# EAGLE board Platypus_v1_0_Proto_v3_0 (EAGLE 7.2.0)
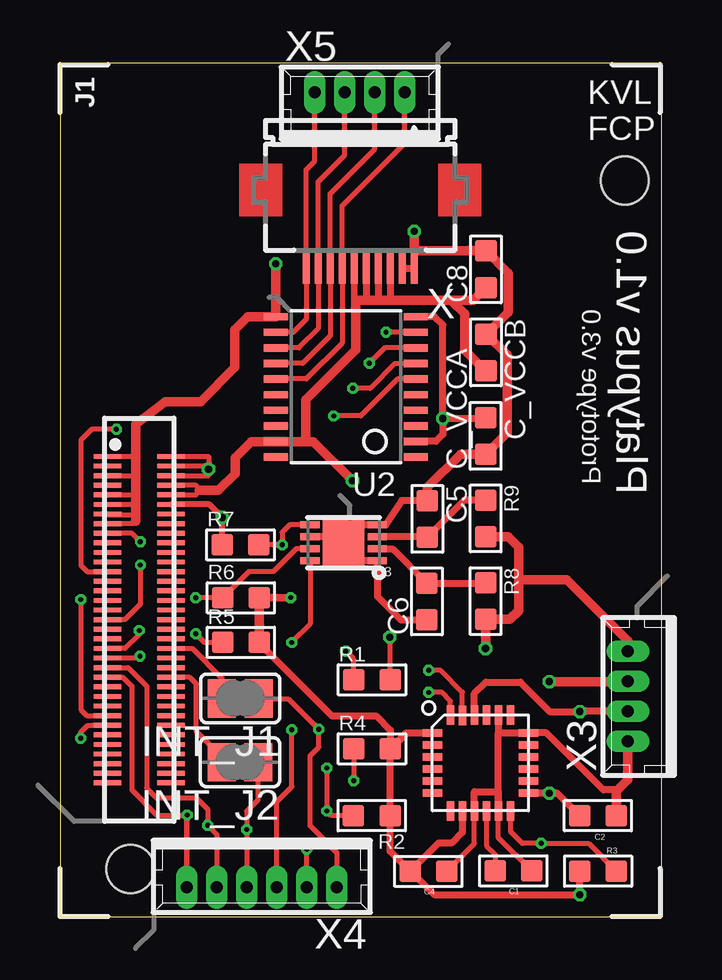
[diagram p0: board, top side]
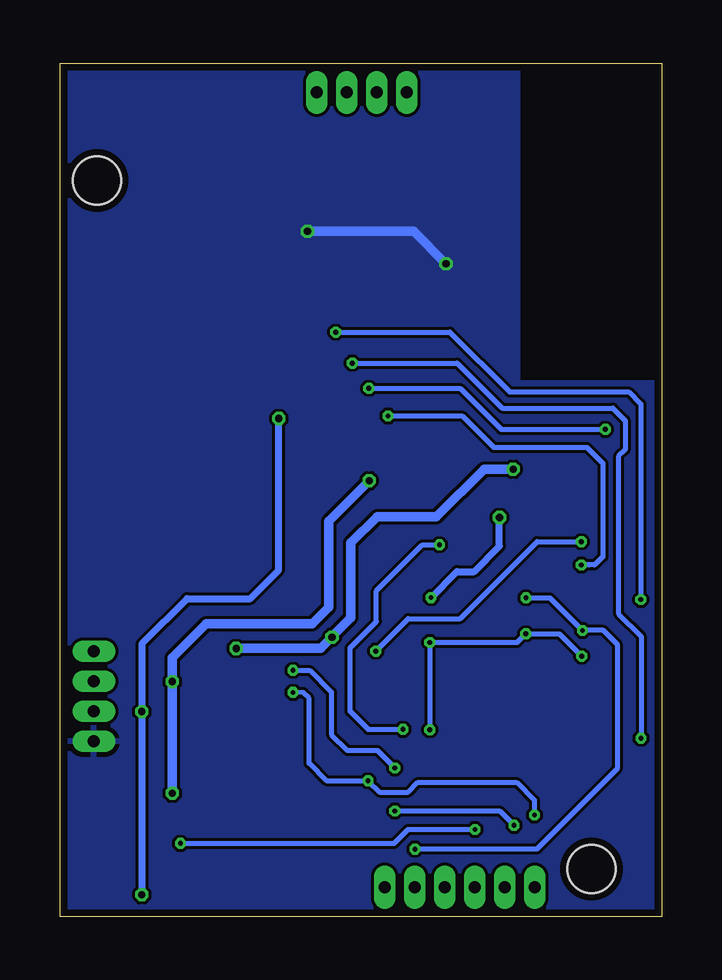
[diagram p1: board, bottom side, seen from below]

Size 25.07 x 35.55 mm. Coordinates in mm from the lower left corner, seen from the top.
Outline: 0,0 25.07,0 25.07,35.55 0,35.55 0,0
Copper layers (1*16): Top 0.035mm / dielectric 1.5mm / Bottom 0.035mm
Design rules "PCB-POOL HighSpec": minimum track width 0.125mm, minimum drill 0.2mm, track to track 0.125mm, track to pad 0.125mm, pad to pad 0.125mm, via to via 0.125mm, smd to smd 0.125mm, copper to edge 0.3mm, drill to drill 0.2mm, minimum pad ring 0.2mm, minimum via ring 0.125mm, stop-mask expansion 0.075mm, vias tented up to drill 0mil, thermal gap 0.2mm

## Footprints (pad centres in the part's own frame; a part is rotated, then mirrored left to right if it is on the bottom)
C0603 = smd 0.889 x 0.889: 1 -0.762,0; 2 0.762,0
SJ = smd 1.168 x 1.6: 1 -0.762,0; 2 0.762,0
EDISON_DAUGHTER = smd 1.14 x 0.2: 1 1.98,19.17; 2 4.62,19.17; 3 1.98,18.77; 4 4.62,18.77; 5 1.98,18.37; 6 4.62,18.37; 7 1.98,17.97; 8 4.62,17.97; 9 1.98,17.57; 10 4.62,17.57; 11 1.98,17.17; 12 4.62,17.17; 13 1.98,16.77; 14 4.62,16.77; 15 1.98,16.37; 16 4.62,16.37; 17 1.98,15.97; 18 4.62,15.97; 19 1.98,15.57; 20 4.62,15.57; 21 1.98,15.17; 22 4.62,15.17; 23 1.98,14.77; 24 4.62,14.77; 25 1.98,14.37; 26 4.62,14.37; 27 1.98,13.97; 28 4.62,13.97; 29 1.98,13.57; 30 4.62,13.57; 31 1.98,13.17; 32 4.62,13.17; 33 1.98,12.77; 34 4.62,12.77; 35 1.98,12.37; 36 4.62,12.37; 37 1.98,11.97; 38 4.62,11.97; 39 1.98,11.57; 40 4.62,11.57; 41 1.98,11.17; 42 4.62,11.17; 43 1.98,10.77; 44 4.62,10.77; 45 1.98,10.37; 46 4.62,10.37; 47 1.98,9.97; 48 4.62,9.97; 49 1.98,9.57; 50 4.62,9.57; 51 1.98,9.17; 52 4.62,9.17; 53 1.98,8.77; 54 4.62,8.77; 55 1.98,8.37; 56 4.62,8.37; 57 1.98,7.97; 58 4.62,7.97; 59 1.98,7.57; 60 4.62,7.57; 61 1.98,7.17; 62 4.62,7.17; 63 1.98,6.77; 64 4.62,6.77; 65 1.98,6.37; 66 4.62,6.37; 67 1.98,5.97; 68 4.62,5.97; 69 1.98,5.57; 70 4.62,5.57 | hole 2: 23.53,30.67; 2.93,1.98
R0603 = smd 0.889 x 0.889: 1 -0.762,0; 2 0.762,0
LGA-24 = smd 0.8 x 0.3: 1 -2,1.25; 2 -2,0.75; 3 -2,0.25; 4 -2,-0.25; 5 -2,-0.75; 6 -2,-1.25; 13 2,-1.25; 14 2,-0.75; 15 2,-0.25; 16 2,0.25; 17 2,0.75; 18 2,1.25 | smd 0.3 x 0.8: 7 -1.25,-2; 8 -0.75,-2; 9 -0.25,-2; 10 0.25,-2; 11 0.75,-2; 12 1.25,-2; 19 1.25,2; 20 0.75,2; 21 0.25,2; 22 -0.25,2; 23 -0.75,1.975; 24 -1.25,2
TSSOP20 = smd 0.305 x 0.991: 1 -2.925,-2.918; 2 -2.275,-2.918; 3 -1.625,-2.918; 4 -0.975,-2.918; 5 -0.325,-2.918; 6 0.325,-2.918; 7 0.975,-2.918; 8 1.625,-2.918; 9 2.275,-2.918; 10 2.925,-2.918; 11 2.925,2.918; 12 2.275,2.918; 13 1.625,2.918; 14 0.975,2.918; 15 0.325,2.918; 16 -0.325,2.918; 17 -0.975,2.918; 18 -1.625,2.918; 19 -2.275,2.918; 20 -2.925,2.918
TDFN-8 = smd 0.8 x 0.3: 1 -1.4,0.75; 2 -1.4,0.25; 3 -1.4,-0.25; 4 -1.4,-0.75; 5 1.4,-0.75; 6 1.4,-0.25; 7 1.4,0.25; 8 1.4,0.75 | smd 1.73 x 1.88: EP 0,0
FH12-10S-0.5SH = smd 0.3 x 1.3: 1 -2.25,3.25; 2 -1.75,3.25; 3 -1.25,3.25; 4 -0.75,3.25; 5 -0.25,3.25; 6 0.25,3.25; 7 0.75,3.25; 8 1.25,3.25; 9 1.75,3.25; 10 2.25,3.25
53047-04 = drill 0.5 pad 0.698 long: 1 1.875,0.45; 2 0.625,0.45; 3 -0.625,0.45; 4 -1.875,0.45
53047-06 = drill 0.5 pad 0.698 long: 1 3.125,0.45; 2 1.875,0.45; 3 0.625,0.45; 4 -0.625,0.45; 5 -1.875,0.45; 6 -3.125,0.45

## Placement (x,y rotation side)
C1  0.1µF  [C0603]  18.89,1.9 180 top
C2  100nF  [C0603]  22.41,4.21 180 top
C4  10nF  [C0603]  15.35,1.88 180 top
C5  10nF  [C0603]  15.31,16.57 270 top
C6  1µF  [C0603]  15.29,13.13 90 top
C8  1µF  [C0603]  17.75,26.97 90 top
C_VCCA  0.1µF  [C0603]  17.73,20.03 90 top
C_VCCB  0.1µF  [C0603]  17.75,23.51 270 top
INT_J1  [SJ]  7.51,9.09 180 top
INT_J2  [SJ]  7.5,6.43 180 top
J1  EDISON_CONNECTOR_FULLMOUNTING_HOLES  [EDISON_DAUGHTER]  0,0 0 top
R1  10k  [R0603]  13,9.86 0 top
R2  10k  [R0603]  12.99,4.21 180 top
R3  10k  [R0603]  22.42,1.89 180 top
R4  10k  [R0603]  13,6.99 0 top
R5  4.7k  [R0603]  7.54,11.42 0 top
R6  4.7k  [R0603]  7.54,13.28 0 top
R7  4.7k  [R0603]  7.52,15.49 0 top
R8  1k  [R0603]  17.73,13.14 270 top
R9  150  [R0603]  17.73,16.59 270 top
U1  MPU-9250  [LGA-24]  17.52,6.4 0 top
U2  TXB0108  [TSSOP20]  11.91,22.07 90 top
U3  MAX17043  [TDFN-8]  11.82,15.57 180 top
X  SHARP96  [FH12-10S-0.5SH]  12.51,30.27 180 top
X3  Power TP  [53047-04]  24.11,9.17 90 top
X4  I2C TP  [53047-06]  8.41,1.67 180 top
X5  Display TP  [53047-04]  12.49,33.89 0 top

## Library data of the parts
C1 C2 C4-C6 C8 C_VCCA C_VCCB R1-R9 = Discrete
INT_J1 INT_J2 = jumper
J1 = Edison
U1 = template
U2 = adafruit
U3 = SparkFun-PowerIC; PROD-ID: IC-10399
X = con-hirose; MPN: FH12-10S-0.5SH(55); OC_FARNELL: 1324540; OC_NEWARK: 34M6152
X3 X5 = con-molex; MF: WALDOM/MOLEX; MPN: 53047-0410; OC_FARNELL: 9733060; OC_NEWARK: 38C9900
X4 = con-molex; MPN: 53047-0610-C; OC_FARNELL: 9733078; OC_NEWARK: 03M2965

## Nets
1.8V: C4.2 C_VCCA.2 J1.12 R2.1 R3.2 R4.2 R5.2 R6.2 R7.1 U1.1 U1.8 U1.22 U2.2 U2.10 X3.3
3.3V: C2.2 C8.1 C_VCCB.2 J1.8 J1.10 U1.13 U2.19 X3.2 X.3 X.4 X.5 X.6
BAT_ALERT: INT_J1.1 R7.2 U3.5 X4.6
DCIN: J1.14
FAULT: J1.19
FW_RCVR: J1.69
GND: C1.1 C2.1 C4.1 C5.1 C6.1 C8.2 C_VCCA.1 C_VCCB.1 J1.1 J1.5 J1.9 J1.11 J1.13 J1.15 U1.9 U1.11 U1.18 U1.20 U2.11 U3.1 U3.4 U3.6 U3.EP X3.4 X.1 X.2
GP12_PWM0: J1.35 U2.6
GP13_PWM1: J1.33
GP14: INT_J2.2 J1.48
GP15: INT_J1.2 J1.42
GP19_I2C_1_SCL: J1.41 R6.1 U3.7 X4.5
GP20_I2C_1_SDA: J1.43 R5.1 U3.8 X4.4
GP27_I2C_6_SCL: J1.45 R2.2 U1.23 X4.2
GP28_I2C_6_SDA: J1.47 R4.1 U1.24 X4.1
GP40_I2S_2_CLK: J1.52
GP41_I2S_2_FS: J1.54
GP42_I2S_2_RXD: J1.50
GP43_I2S_2_TXD: J1.56
GP44: J1.24
GP45: J1.26
GP46: J1.28
GP47: J1.30
GP48: J1.32
GP49: J1.34
GP77_SD_0_CD#: J1.60
GP78_SD_0_CLK: J1.58
GP79_SD_0_CMD: J1.62
GP80_SD_0_DAT0: J1.66
GP81_SD_0_DAT1: J1.70
GP82_SD_0_DAT2: J1.64
GP83_SD_0_DAT3: J1.68
GP84_SD_CLK_FB: J1.44
GP109_SPI_2_CLK: J1.55 U2.9
GP110_SPI_2_FS0: J1.53
GP111_SPI_2_FS1: J1.51
GP114_SPI_2_RXD: J1.59
GP115_SPI_2_TXD: J1.57 U2.8
GP128_UART_1_CTS: J1.65
GP129_UART_1_RTS: J1.63
GP130_UART_1_RX: J1.61
GP131_UART_1_TX: J1.46
GP134_UART_2_RX: J1.22
GP135_UART_2_TX: J1.27
GP165: J1.25 U2.7
GP182_PWM2: J1.37
GP183_PWM3: J1.39
IMU_INT: INT_J2.1 R3.1 U1.12 X4.3
MSIC_SLP_CLK: J1.7
N$5: C1.2 U1.10
N$6: C6.2 R8.1 U3.2
N$13: C5.2 R9.1 U3.3
OSC_CLK_OUT: J1.67
PSW: J1.21
PWRBTN#: J1.17 R1.1
RCVR_MODE: J1.31
RESET_OUT#: J1.36
SHARP_EXT: U2.15 X5.1 X.7
SHARP_SCLK: U2.12 X5.4 X.10
SHARP_SCS: U2.14 X5.2 X.8
SHARP_SI: U2.13 X5.3 X.9
USB_DN: J1.18
USB_DP: J1.16
USB_ID: J1.3
USB_VBUS: J1.20
V_BAT_BKUP: J1.23
VSYS: J1.2 J1.4 J1.6 R1.2 R8.2 R9.2 X3.1

## Tracks (layer width: path | path; a pad name or v marks a point on that pad's centre or on a via)
1.8V  (via drill 0.2, 0.3)
  Top 0.2: C_VCCA.2 17.69,20.75 | U1.1 14.51,7.65 13.77,6.91 13.77,2.73 14.6,1.9
  Top 0.24: 6.22,17.17 J1.12
  Top 0.25: R7.1 v6.76,16.63 | v6.76,16.63 6.22,17.17
  Top 0.3: v15.95,20.75 v15.95,20.74 v15.96,20.75 17.69,20.75 | v15.95,20.75 15.95,24.65 15.6,25 U2.10 | v15.95,20.75 15.95,20.09 15.66,19.8 U2.2 | R3.2 v21.66,0.91 15.59,0.91 14.6,1.9 | v6.76,16.63 | R6.2 8.31,13.29 v9.61,13.29 R6.2 8.29,11.39 8.3,11.39 11.33,8.36 13.17,8.36 13.76,7.77 R4.2 | R4.2 13.76,4.22 R2.1 13.75,2.72 C4.2 15.77,3.06 16.32,3.06 16.77,3.51 U1.8 | R4.2 14.42,7.65 U1.1 | X3.3 v21.67,8.55 v21.66,8.54 20.41,8.54 19.18,9.77 17.74,9.77 17.27,9.3 U1.22 | R4.2
  Top 0.4: R6.2 R5.2 | R7.1
  Bottom 0.3: v21.66,0.91 21.66,4.89 v21.66,8.54 21.66,11.36 19.77,13.25 17.14,13.25 15.96,14.43 v15.95,20.75 | v9.61,13.29 8.53,14.37 7.82,14.37 6.76,15.43 v6.76,16.63
3.3V  (via drill 0.3)
  Top 0.2: U1.13 | J1.8 5.68,17.97 5.8,17.76 5.66,17.57 J1.10 | C_VCCB.2 17.71,22.75
  Top 0.28: X.6 12.26,25.68 12.32,25.68
  Top 0.3: 13.76,27.05 X.3 13.76,25.68 13.74,25.68 | U2.19 | X3.2 | X.6 | X.5 12.76,25.68 | X.4 13.26,25.68 13.27,25.68 | U1.13 v20.38,5.15 v20.39,5.14 20.72,5.14 C2.2
  Top 0.4: 10.23,19.79 U2.19 7.97,19.79 7.3,19.12 7.3,18.46 6.6,17.76 5.8,17.76 | 10.23,19.79 10.23,21.53 12.32,23.62 12.32,25.68 12.76,25.68 13.27,25.68 13.74,25.68 | 13.76,25.68 16.29,25.68 | 16.29,25.68 17.22,25.68 C8.1 | 17.71,22.75 16.86,23.6 16.86,25.11 16.29,25.68 | X3.2 v20.39,9.79 | 10.23,19.79 10.56,19.79 v12.19,18.16
  Bottom 0.4: v20.39,5.14 v20.39,9.79 20.39,10.78 18.97,12.2 14.55,12.2 13.87,12.88 13.87,16.48 v12.19,18.16
BAT_ALERT  (via drill 0.2)
  Top 0.2: X4.6 11.53,2.67 10.42,3.78 10.42,6.69 10.79,7.06 v10.78,7.8 9.51,9.07 8.29,9.07 | R7.2 v9.26,15.49 9.26,16.01 9.57,16.32 U3.5
  Top 0.3: INT_J1.1 8.29,9.07
  Bottom 0.2: v9.26,15.49 9.97,15.49 11.89,13.57 11.89,12.29 12.98,11.2 12.98,8.55 12.23,7.8 v10.78,7.8
GND  (via drill 0.3)
  Top 0.2: C4.1 17.27,3.04 U1.9 | C1.1 18.27,3.28 U1.11 | 3.15,16.47 3.04,16.37 J1.15 | J1.13 2,16.75 3.15,16.75 | J1.11 3.1,17.17 arc90 3.15,17.22 | J1.1 3.13,19.17 arc-90 3.15,19.15 | J1.5 3.08,18.37 arc-90 3.15,18.3 | J1.9 3.13,17.57 arc90 3.15,17.59 | C_VCCB.1 17.77,24.27 | X.1 14.76,27.73
  Top 0.3: 12.57,16.32 U3.4 13.58,16.32 14.23,17.33 C5.1 | 12.26,14.82 U3.1 13.22,13.34 14.2,12.36 C6.1 | 11.57,15.82 U3.6 | 23.17,5.22 23.23,5.28 22.64,5.28 20.27,7.65 U1.18 18.27,7.65 | X.2 X.1 | U1.20 18.27,7.65 | U1.9 17.27,5.21 18.27,5.21 U1.11 18.27,7.65
  Top 0.4: 23.23,5.28 23.66,5.71 X3.4 | C2.1 23.17,5.22 | v8.99,27.2 U2.11 7.83,24.99 7.29,24.45 7.29,22.88 5.86,21.45 4.39,21.45 3.15,20.51 3.15,19.15 3.15,18.3 3.15,17.59 3.15,17.22 3.15,16.75 3.15,16.47 | C_VCCB.1 18.67,25.19 18.67,26.81 C8.2 14.76,27.73 v14.76,28.55 | 17.77,24.27 18.63,23.41 18.63,20.17 C_VCCA.1 16.7,19.27 15.31,17.88 C5.1
  Top 0.406: 12.57,16.32 arc90 U3.EP | 12.26,14.82 arc-90 12.21,14.87 12.21,15.18 arc90 U3.EP | U3.EP 11.57,15.82 | C6.1
  Bottom 0.4: v14.76,28.55 10.34,28.55 v8.99,27.2
  pour Bottom: 5.99,35.44 24.97,35.44 24.97,0.14 0.1,0.14 0.1,22.25 5.97,22.25 5.97,35.43
GP12_PWM0  (via drill 0.2)
  Top 0.2: U2.6 14.08,22.4 12.54,20.86 v11.4,20.86 | v3.35,14.65 3.35,13.02 2.7,12.37 J1.35
  Bottom 0.2: 3.02,14.65 v3.35,14.65 2.79,14.65 2.45,14.99 2.45,18.88 3.12,19.55 7,19.55 8.31,20.86 v11.4,20.86
GP14
  Top 0.2: 6.74,6.66 5.68,7.72 5.68,9.69 5.4,9.97 J1.48
  Top 0.3: INT_J2.2 6.74,6.66
GP15
  Top 0.2: INT_J1.2 6.75,9.93 5.51,11.17 J1.42
  Top 0.3: INT_J1.2 6.72,9.12
GP19_I2C_1_SCL  (via drill 0.2)
  Top 0.2: J1.41 2.7,11.17 3.3,11.77 v3.3,11.92 | v5.65,13.28 R6.1 7.87,14.37 8.89,14.37 9.84,15.32 U3.7 | X4.5 v10.28,2.81
  Bottom 0.2: 2.44,11.92 1.86,11.35 | 1.86,11.35 2.43,11.92 v3.3,11.92 4.66,13.28 v5.65,13.28 | 1.86,11.35 1.86,6.15 5.2,2.81 v10.28,2.81
GP20_I2C_1_SDA  (via drill 0.2)
  Top 0.2: v3.33,10.85 3.25,10.77 J1.43 | X4.4 9.03,4.79 9.66,5.41 v9.66,7.78 | v5.66,11.78 6.02,11.42 R5.1 | U3.8 10.42,12.18 v9.66,11.42
  Bottom 0.2: v5.66,11.78 4.26,11.78 v3.33,10.85 | v5.67,11.77 v5.66,11.78 | v5.66,11.78 6.02,11.42 v9.66,11.42 v9.66,7.78
GP27_I2C_6_SCL  (via drill 0.2)
  Top 0.2: v11.12,6.19 v11.12,4.4 11.31,4.21 R2.2 | X4.2 6.53,3.42 v6.15,3.8 6.15,4.48 5.68,4.95 4.01,4.95 3.61,5.35 3.61,9.6 2.84,10.37 J1.45 | U1.23 16.77,9.35 15.86,10.26 v15.36,10.26
  Bottom 0.2: v11.12,6.19 11.85,6.92 13.1,6.92 13.76,7.58 13.76,9.35 14.67,10.26 v15.36,10.26 | v11.12,4.4 6.75,4.4 v6.15,3.8
GP28_I2C_6_SDA  (via drill 0.2)
  Top 0.2: R4.1 v12.24,5.66 | 5.28,4.21 X4.1 5.29,1.12 5.29,4.21 5.27,4.23 | U1.24 16.27,8.99 15.92,9.34 v15.36,9.34 | v5.29,4.24 v5.3,4.23 4.04,4.23 2.99,5.28 2.99,9.6 2.62,9.97 J1.47
  Top 0.3: v5.3,4.23 5.28,4.21
  Bottom 0.2: v15.36,9.34 14.93,9.33 14.69,9.09 14.69,6.38 13.97,5.66 v12.24,5.66 11.76,5.18 10.57,5.18 10.16,5.59 6.04,5.59 5.3,4.85 v5.3,4.23
GP109_SPI_2_CLK  (via drill 0.2)
  Top 0.2: v0.87,13.21 0.87,8.62 1.12,8.37 J1.55 | U2.9 v13.58,24.35
  Bottom 0.2: 0.87,13.15 v0.87,13.21 0.87,21.35 1.38,21.86 6.34,21.86 8.83,24.35 v13.58,24.35
GP115_SPI_2_TXD  (via drill 0.2)
  Top 0.2: v0.86,7.43 0.86,7.67 1.16,7.97 J1.57 | U2.8 13.53,23.7 v12.89,23.06
  Bottom 0.2: v0.86,7.43 0.86,11.68 1.8,12.62 1.8,19.17 1.52,19.45 1.52,20.69 1.53,20.69 2.03,21.19 6.65,21.19 8.52,23.06 v12.89,23.06
GP165  (via drill 0.2)
  Top 0.2: U2.7 13.95,23.05 12.92,22.01 v12.2,22.01 | v2.35,20.3 1.32,20.3 0.87,19.85 0.87,14.63 1.13,14.37 J1.25
  Bottom 0.2: v2.34,20.29 v2.35,20.3 6.69,20.3 8.4,22.01 v12.2,22.01
IMU_INT  (via drill 0.2)
  Top 0.2: U1.12 18.77,3.55 19.26,3.06 | 19.26,3.06 19.27,3.05 19.29,3.05 | R3.1 22.02,3.05 v20.05,3.05 19.29,3.05 | 19.26,3.06 19.28,3.06 19.29,3.05 | X4.3 7.78,3.26 v7.78,3.63 7.78,4.39 8.24,4.85 8.24,6.41
  Top 0.3: 8.25,6.42 INT_J2.1 8.24,6.41
  Bottom 0.2: v20.05,3.05 11.15,3.05 10.57,3.63 v7.78,3.63
N$5
  Top 0.2: U1.10 17.77,2.96 18.13,2.6 C1.2
  Top 0.4: C1.2
N$6
  Top 0.3: U3.2 13.86,15.32 C6.2 17.68,13.89
  Top 0.406: 17.68,13.89 R8.1
N$13
  Top 0.3: 15.3,15.82 U3.3 | R9.1 16.85,17.35 C5.2
  Top 0.406: C5.2 15.3,15.82
PWRBTN#  (via drill 0.2)
  Top 0.2: v3.35,15.62 3,15.97 J1.17 | R1.1 12.24,10.73 v11.91,11.06
  Bottom 0.2: v11.91,11.06 10.56,12.41 8.4,12.41 5.19,15.62 v3.35,15.62
SHARP_EXT
  Top 0.2: U2.15 10.27,22.4 11.76,23.89 X.7 11.76,29.62 14.37,32.23 X5.1
SHARP_SCLK
  Top 0.2: X5.4 10.61,34.4 10.61,31.47 10.26,31.12 X.10 10.26,24.88 10.25,24.88 9.71,24.34 U2.12
SHARP_SCS
  Top 0.2: U2.14 10.11,23.05 11.26,24.2 X.8 11.26,30.12 13.11,31.97 X5.2
SHARP_SI
  Top 0.2: U2.13 9.95,23.7 10.75,24.5 10.76,24.5 X.9 10.76,30.62 11.86,31.72 X5.3
VSYS  (via drill 0.3)
  Top 0.2: R1.2 13.76,11.62 | v6.19,18.64 6.06,18.77 J1.4 | J1.2 6.19,19.17 v6.19,18.64 | J1.6 6.19,18.37 v6.19,18.64
  Top 0.3: 18.74,12.38 18.73,12.38 | 13.76,11.62 v13.74,11.64
  Top 0.4: R9.2 18.67,15.83 19.11,15.39 19.11,14.04 | 19.11,14.04 19.11,12.75 18.73,12.38 R8.2 | R8.2 v17.73,11.17 | X3.1 23.66,11.5 21.12,14.04 19.11,14.04
  Top 0.406: R8.2
  Bottom 0.3: v13.74,11.64 13.7,11.64
  Bottom 0.4: v6.19,18.64 7.4,18.64 9.39,16.65 11.85,16.65 11.86,16.66 12.95,15.57 12.95,12.44 v13.74,11.65 v13.74,11.64 14.21,11.17 v17.73,11.17

## Text on the board
tDocu: Display Test Point | SHARP_SCK | SHARP_SI | SHARP_SCS | SHARP_EXT | SHARP / Display / Connector | TXB0108 | C8 1µF | Antenna KOZ | C_VCCB / / 0.1µF | Level / / Shifter | C_VCCA / / 0.1µF | Battery / Gauge | R7 4k7 | MAX / 17043 | C5 10nF | R9 150 | R6 4k7 | Power / Test / Point | C6 1µF | R5 4k7 | R8 1k | J_BAT | VSYS | R1 10k | 3V3 | 1V8 | J_IMU | R4 10k | GND | Intel Edison 70-pin Hirose Connector | MPU / 9250 | R2 10k | C2 100nF | C4 10nF | C1 0.1µF | R3 10k | IMU_SDA | IMU_SCL | IMU_INT | BAT_SDA | BAT_SCL | BAT_INT | I2C Test Point
tSilk: KVL / FCP | Platypus v1.0
_tsilk: Prototype v3.0